# Altium PCB PCB_Board ESP32S 3-XYZ_2021-06-26.pcbdoc
Units mil, origin at the board's own origin, x right, y up, seen from the top; angles counter-clockwise.
Board outline 11580 x 6820 mil, 2 copper layers (Top Layer, Bottom Layer); 73 components, 87 nets, 284 pads, 17 vias.
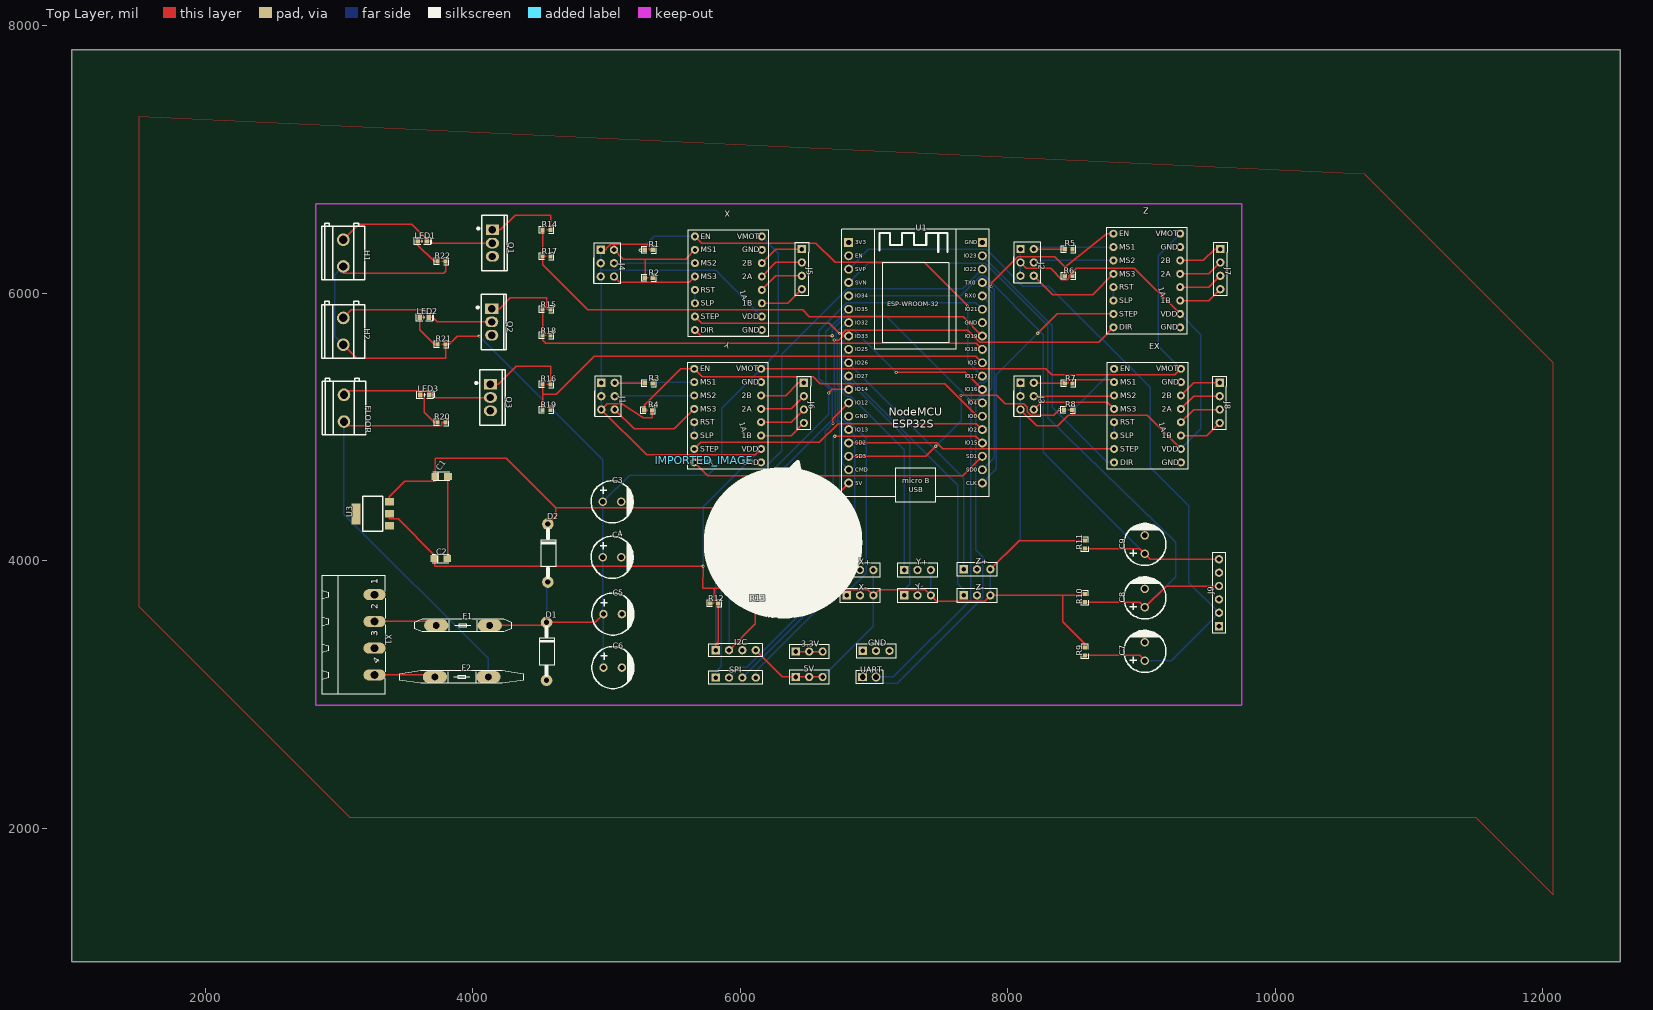
[diagram p0: Top Layer view]
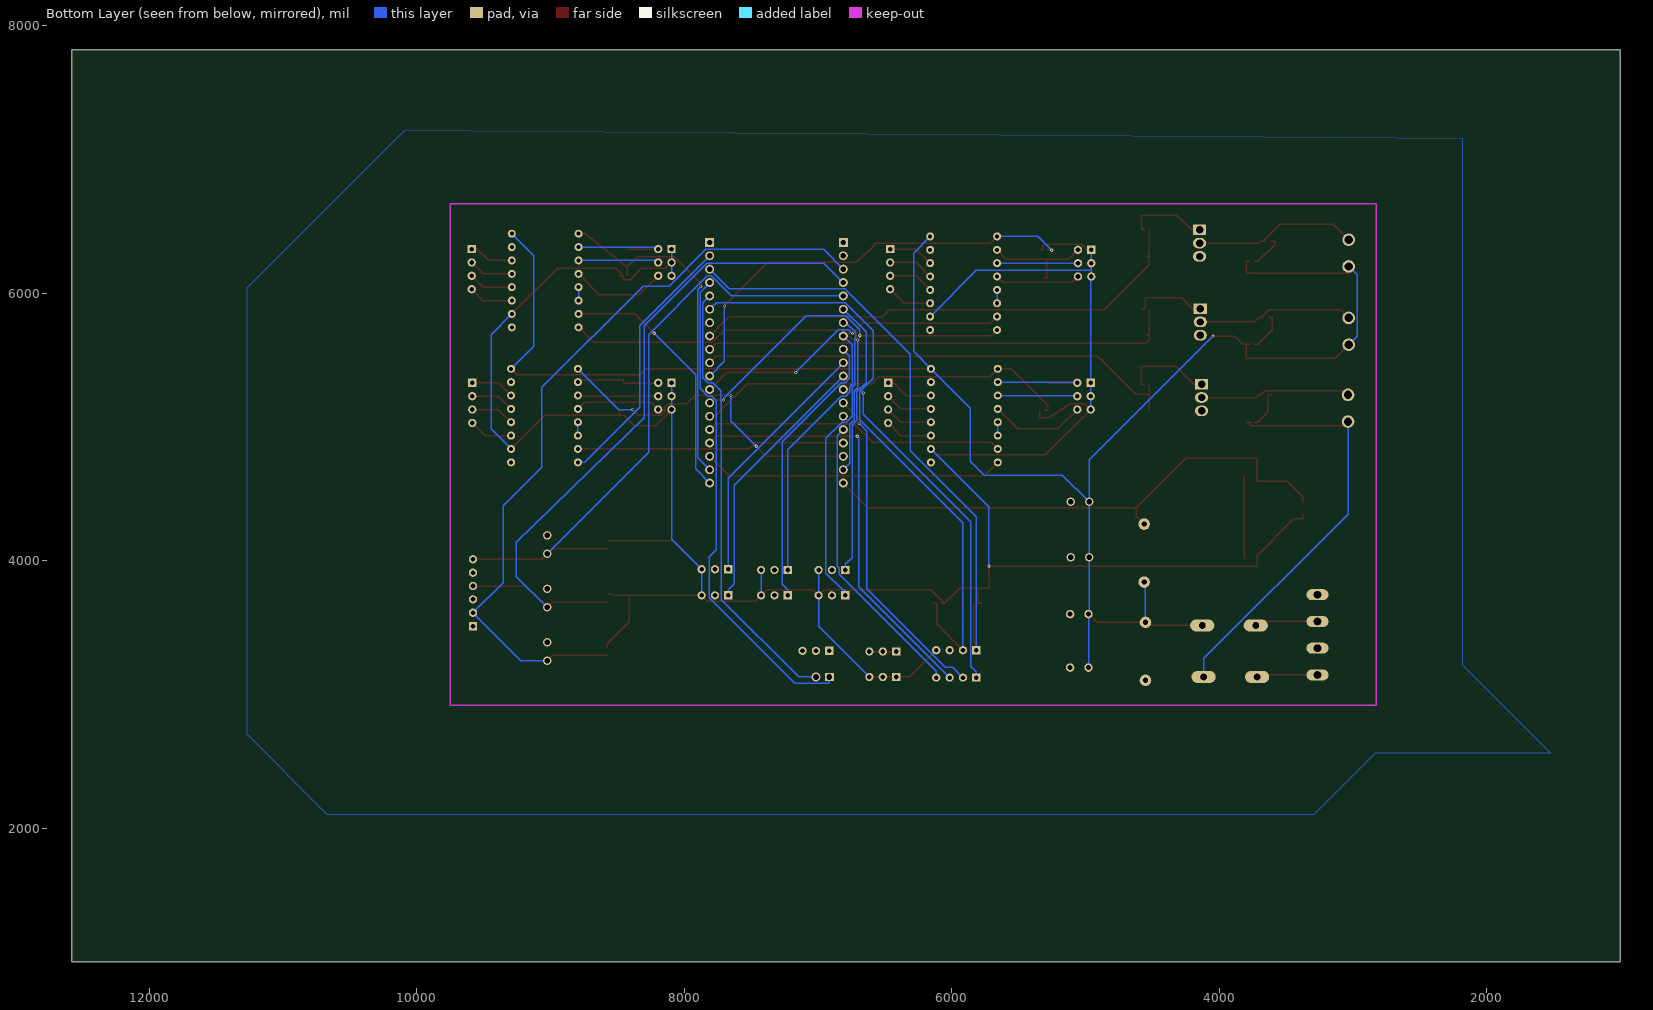
[diagram p1: Bottom Layer view, seen from below]

## Layer stack, top to bottom
Top Layer: signal copper (thickness not stored)
Dielectric: dielectric 12.6, FR-4, Dk 4.8
Bottom Layer: signal copper (thickness not stored)

## Board outline
12580,1000 1000,1000 1000,7820 12580,7820

## Components (designator, comment, footprint, x,y, rotation, side; value= is the part's Value field where it differs from the comment)
3.3V "HDR-M-2.54_1x3" HDR-M-2.54_1X3 6515,3320 r0 top
5V "HDR-M-2.54_1x3" HDR-M-2.54_1X3 6515,3130 r0 top
C1 "100u/16V" CASE-A_3216 3765,4630 r0 top
C2 "22u/16V" CASE-A_3216 3760,4015 r0 top
C3 "100u" CAP-D8.0×F3.5 5040,4440 r0 top
C4 "100u" CAP-D8.0×F3.5 5040,4025 r0 top
C5 "100u" CAP-D8.0×F3.5 5045,3600 r0 top
C6 "100u" CAP-D8.0×F3.5 5045,3200 r0 top
C7 "10u" CAP-D8.0×F3.5 9025,3320 r90 top
C8 "10u" CAP-D8.0×F3.5 9025,3720 r90 top
C9 "10u" CAP-D8.0×F3.5 9025,4120 r90 top
D1 "1N4004" "DIODE LEAD SP 11MM" 4550,3105 r0 top
D2 "1N4004" "DIODE LEAD SP 11MM" 4560,3840 r0 top
EX "A4988" "A4988 STEPPER MOTOR DRIVER CARRIER" 9045,5085 r0 top
F1 "MFR500" MFR500 3925,3515 r0 top
F2 "MFR1100" MFR1100 3915,3130 r0 top
FLOOR "CONN-TH_2P-P5.08" CONN-TH_2P-P5.08 3035,5140 r270 top
GND "HDR-M-2.54_1x3" HDR-M-2.54_1X3 7015,3325 r0 top
H1 "CONN-TH_2P-P5.08" CONN-TH_2P-P5.08 3030,6300 r270 top
H2 "CONN-TH_2P-P5.08" CONN-TH_2P-P5.08 3030,5715 r270 top
I2C "HDR-M-2.54_1x4" HDR-M-2.54_1X4 5965,3330 r0 top
IMPORTED_IMAGE "IMPORTED_IMAGE" IMPORTED_IMAGE 5728.75,4750.41 r0 top
J1 "HDR-M-2.54_2x3" HDR-M-2.54_2X3 4960,5330 r270 top
J2 "HDR-M-2.54_2x3" HDR-M-2.54_2X3 8095,6330 r270 top
J3 "HDR-M-2.54_2x3" HDR-M-2.54_2X3 8095,5330 r270 top
J4 "HDR-M-2.54_2x3" HDR-M-2.54_2X3 4955,6325 r270 top
J5 "HDR-M-2.54_1x4" HDR-M-2.54_1X4 6460,6180 r270 top
J6 "HDR-M-2.54_1x4" HDR-M-2.54_1X4 6475,5180 r270 top
J7 "HDR-M-2.54_1x4" HDR-M-2.54_1X4 9590,6180 r270 top
J8 "HDR-M-2.54_1x4" HDR-M-2.54_1X4 9585,5180 r270 top
J9 "HDR-M-2.54_1x6" HDR-M-2.54_1X6 9580,3760 r90 top
LED1 "LED-0603_R" LED0603_RED 3620,6390 r0 top
LED2 "LED-0603_R" LED0603_RED 3635,5820 r0 top
LED3 "LED-0603_R" LED0603_RED 3640,5240 r0 top
Q1 "STP55NF06L" TO-220-3_L10.0-W4.5-P2.54-L 4145,6375 r270 top
Q2 "STP55NF06L" TO-220-3_L10.0-W4.5-P2.54-L 4140,5785 r270 top
Q3 "STP55NF06L" TO-220-3_L10.0-W4.5-P2.54-L 4130,5220 r270 top
R1 "10k" R0603 5315,6325 r0 top
R2 "100k" R0603 5315,6115 r0 top
R3 "100k" R0603 5315,5325 r0 top
R4 "10k" R0603 5310,5125 r0 top
R5 "100k" R0603 8455,6330 r0 top
R6 "10k" R0603 8455,6130 r0 top
R7 "100k" R0603 8455,5325 r0 top
R8 "10k" R0603 8450,5130 r0 top
R9 "4.7K" R0603 8575,3320 r90 top
R10 "4.7K" R0603 8575,3720 r90 top
R11 "4.7K" R0603 8575,4120 r90 top
R12 "4.7k" R0603 5805,3680 r0 top
R13 "4.7k" R0603 6110,3680 r0 top
R14 "10 Oh" R0603 4550,6475 r0 top
R15 "10 Oh" R0603 4550,5880 r0 top
R16 "10 Oh" R0603 4550,5320 r0 top
R17 "100k" R0603 4550,6275 r0 top
R18 "100k" R0603 4550,5685 r0 top
R19 "100k" R0603 4550,5130 r0 top
R20 "1.8K" R0603 3765,5035 r0 top
R21 "1.8K" R0603 3765,5620 r0 top
R22 "1.8K" R0603 3765,6240 r0 top
SPI "HDR-M-2.54_1x4" HDR-M-2.54_1X4 5965,3125 r0 top
U1 "NODEMCU_ESP32-DEVKITC" NODEMCU-ESP32S 6710,6580 r0 top
U3 "AMS1117" AMS1117 3085,4220 r90 top
UART "HDR-M-2.54_1x2" HDR-M-2.54_1X2 6965,3130 r0 top
X "A4988" "A4988 STEPPER MOTOR DRIVER CARRIER" 5910,6075 r0 top
X1 "CON-PHOENIX-508_MSTBA4" MSTBA4 3100,3460 r270 top
X+ "HDR-M-2.54_1x3" HDR-M-2.54_1X3 6895,3930 r0 top
X- "HDR-M-2.54_1x3" HDR-M-2.54_1X3 6895,3740 r0 top
Y "A4988" "A4988 STEPPER MOTOR DRIVER CARRIER" 5905,5085 r0 top
Y+ "HDR-M-2.54_1x3" HDR-M-2.54_1X3 7325,3930 r0 top
Y- "HDR-M-2.54_1x3" HDR-M-2.54_1X3 7325,3740 r0 top
Z "A4988" "A4988 STEPPER MOTOR DRIVER CARRIER" 9040,6095 r0 top
Z+ "HDR-M-2.54_1x3" HDR-M-2.54_1X3 7770,3935 r0 top
Z- "HDR-M-2.54_1x3" HDR-M-2.54_1X3 7770,3740 r0 top

## Footprints (in the part's own frame and the unit in brackets; to place one, negate y for a bottom-side part, rotate by r counter-clockwise, add the part's x,y. Pads: shape width x height; smd on the part's side, far side on the other; paste and mask are expansions set on the pad)
"A4988 STEPPER MOTOR DRIVER CARRIER" [mil]
  round 60 hole 30: 1(-250,350) 2(-250,250) 3(-250,150) 4(-250,50) 5(-250,-50) 6(-250,-150) 7(-250,-250) 8(-250,-350) 9(250,-350) 10(250,-250) 11(250,-150) 12(250,-50) 13(250,50) 14(250,150) 15(250,250) 16(250,350)
  silkscreen extent -300,-400 300,400
AMS1117 [mil]
  rect 55.12x66.93 smd: 1(40,-290) 2(130,-290) 3(220,-290)
  rect 157.48x66.93 smd: 4(130,-40)
  silkscreen extent 0,-240 260,-90
CAP-D8.0×F3.5 [mm]
  round 1.6 hole 1: 1(-1.75,0) 2(1.75,0)
  silkscreen extent -3.96,-4 4.04,4
CASE-A_3216 [mil]
  rect 59.05x53.5 smd: 1(-47.24,0) 2(47.25,0)
  silkscreen extent -65,-30 61,33
CONN-TH_2P-P5.08 [mm]
  round 2.4 hole 1.6: 1(-2.54,0) 2(2.54,0)
  silkscreen extent -5.72,-4.1 5.08,4.1
"DIODE LEAD SP 11MM" [mm]
  round 2.2 hole 1: A(0,-0.011) C(0,10.999)
  silkscreen extent -1.27,1 1.47,10
HDR-M-2.54_1X2 [mm]
  rect 1.7x1.575 hole 1.1: 1(-1.27,0)
  round 1.7 hole 1.1: 2(1.27,0)
  silkscreen extent -2.54,-1.27 2.54,1.27
HDR-M-2.54_1X3 [mil]
  rect 62x62 hole 35: 1(-100,0)
  round 62 hole 35: 2(0,0) 3(100,0)
  silkscreen extent -150,-50 150,50
HDR-M-2.54_1X4 [mil]
  rect 62x62 hole 35: 1(-150,0)
  round 62 hole 35: 2(-50,0) 3(50,0) 4(150,0)
  silkscreen extent -200,-50 200,50
HDR-M-2.54_1X6 [mil]
  rect 62x62 hole 35: 1(-250,0)
  round 62 hole 35: 2(-150,0) 3(-50,0) 4(50,0) 5(150,0) 6(250,0)
  silkscreen extent -300,-50 300,50
HDR-M-2.54_2X3 [mil]
  rect 62x62 hole 35: 1(0,0)
  round 62 hole 35: 2(0,100) 3(100,0) 4(100,100) 5(200,0) 6(200,100)
  silkscreen extent -50,-50 250,150
IMPORTED_IMAGE [mil]
  silkscreen extent 0,-1181 1181,0
LED0603_RED [mm]
  rect 0.9x1 smd: 1(-0.85,0) 2(0.85,0)
  silkscreen extent -1.54,-0.73 1.75,0.73
MFR500 [mil]
  oval 181.1x90.55 hole 47.24 slot 47.44 at 0 deg: 1(-200,0) 2(200,0)
  silkscreen extent -365,-45 365,45
MFR1100 [mil]
  oval 181.1x90.55 hole 47.24 slot 47.44 at 0 deg: 1(-200,0) 2(200,0)
  silkscreen extent -465,-45 465,45
MSTBA4 [mil]
  oval 82.5x165 hole 55 slot 55.2 at 90 deg: 1(-285.04,163.78) 2(-85.04,163.78) 3(114.96,163.78) 4(314.96,163.78)
  silkscreen extent -425,-231 455,244
NODEMCU-ESP32S [mm]
  rect 1.7x1.7 hole 1: 1(2.54,-5.08) 38(27.94,-5.08)
  round 1.7 hole 1: 2(2.54,-7.62) 3(2.54,-10.16) 4(2.54,-12.7) 5(2.54,-15.24) 6(2.54,-17.78) 7(2.54,-20.32) 8(2.54,-22.86) 9(2.54,-25.4) 10(2.54,-27.94) 11(2.54,-30.48) 12(2.54,-33.02) 13(2.54,-35.56) 14(2.54,-38.1) 15(2.54,-40.64) 16(2.54,-43.18) 17(2.54,-45.72) 18(2.54,-48.26) 19(2.54,-50.8) 20(27.94,-50.8) 21(27.94,-48.26) 22(27.94,-45.72) 23(27.94,-43.18) 24(27.94,-40.64) 25(27.94,-38.1) 26(27.94,-35.56) 27(27.94,-33.02) 28(27.94,-30.48) 29(27.94,-27.94) 30(27.94,-25.4) 31(27.94,-22.86) 32(27.94,-20.32) 33(27.94,-17.78) 34(27.94,-15.24) 35(27.94,-12.7) 36(27.94,-10.16) 37(27.94,-7.62)
  silkscreen extent 1.27,-54.32 29.21,-2.54
R0603 [mil]
  rect 31.75x34.02 smd: 1(-29.65,0) 2(29.65,0)
  silkscreen extent -55,-26 55,26
TO-220-3_L10.0-W4.5-P2.54-L [mm]
  rect 2x2.5 hole 1.4: 1(-2.54,0)
  oval 2x2.5 hole 1.4: 2(0,0) 3(2.54,0)
  silkscreen extent -5.3,-2.86 5.3,2.8

## Via types
v1: diameter 24.02, hole 12.01, Top Layer to Bottom Layer, 17 vias

## Nets (pads, with @x,y where several pads share a name; then routed paths per layer and width w, separated by ;. In a path a pad name is that pad's centre, name@x,y a point inside that pad or via, vN(x,y) a via of type N, cw(c..) or ccw(c..) an arc to the next point about the centre after c; other vN are vias at no path point)
3.3V: 3.3V.1 3.3V.2 3.3V.3 | length 200
  Top Layer w10: 3.3V.1 3.3V.2 3.3V.3
3V3: U1.1
5V: 5V.1 5V.2 5V.3 C2.1 EX.10 I2C.4 J1.1 J1.3 J1.5 J2.1 J2.3 J2.5 J3.1 J3.3 J3.5 J4.1 J4.3 J4.5 R1.2 R4.2 R6.2 R8.2 R9.2 R10.2 R11.2 R12.1 R13.1 U3.2 X+.3 X-.3 X.10 Y+.3 Y-.3 Y.10 Z+.3 Z-.3 Z.10 | length 20894.1
  Top Layer w10: U3.2 3375,4311.37 3439.21,4311.37 3717.76,4032.82 3712.76,4027.82 C2.1 ; C2.1@3717.76,4013.91 3716.67,4015 C2.1 ; J4.1 4997.07,6325 4997.07,6335.53 5028.61,6367.07 5302.59,6367.07 5317.71,6351.95 5317.71,6325 R1.2 ; R4.2 5339.7,5069.7 5275,5070 5111.3,5173.7 5003.8,5173.7 J1.5 5298.75,4791.25 6111.25,4791.25 Y.10 ; R12.1 5802.29,3680 5802.29,3706.95 5803.4,3795 ; 5805,3795 5803.4,3795 ; 5807,3795 5720,3795 v1(5721.12,3957.18) 3717.76,3957.18 3712.76,3962.18 C2.1 ; R13.1 6053.4,3680 ; I2C.4 6315,3130 5V.1 5V.2 5V.3 ; Z+.3 8084.66,4149.66 R11.2 ; J3.5 8215,5010 8375.6,5010 8452.7,5087.1 9042.9,5087.1 EX.10 ; J2.3 8139.29,6185.71 8321.1,6185.71 8404.89,6101.92 8445.8,6101.92 8457.71,6113.83 8457.71,6130 ; 8452.71,5130 R8.2 ; R6.2 8457.71,6130 ; 8485,5088.55 R8.2@8485,5131.45 ; 8537.3,3740 8410,3740 8410,3541.6 8575,3376.6 R9.2 ; R10.2 8546.92,3749.66 8537.26,3740 Z-.3 7827.92,3697.92 7467.08,3697.92 Y-.3 7382.92,3782.08 7037.08,3782.08 X-.3 6952.92,3782.08 6155.48,3782.08 6053.4,3680 ; Z.10 8946.55,6188.45 8511.97,6188.45 8473.8,6150.28 8473.8,6146.93 8457.71,6130.84 8457.71,6130 ; 5803.4,3795 5938.4,3795 6053.4,3680
  Bottom Layer w10: J4.1 J4.3 4955,6170.4 ; J1.5 J1.3 J1.1 4960,6120 J4.5 4955,6170.4 ; v1(5721.12,3957.18) 5721.12,4401.12 Y.10 ; X.10 5814.6,6170.4 4955,6170.4 ; 5V.3 6995,3510 X-.3 X+.3 ; Y-.3 Y+.3 ; Z-.3 Z+.3 8095,4160 J3.5 J3.3 J3.1 ; J2.5 J2.3 J2.1 ; Z.10 9445,5690 9445,4985 EX.10
12V: C3.1 C4.1 C5.1 C6.1 D1.C D2.A EX.16 F1.2 H1.2 H2.2 R21.2 R22.2 X.16 Y.16 Z.16 | length 14079.8
  Top Layer w10: H2.2 3130,5515 3794.7,5515 R21.2 ; H1.2 3030,6150 3780,6150 3794.7,6164.7 R22.2 ; 3767.71,5620 3781.19,5620 R21.2 3821.6,5620 3880.84,5679.24 v1(4045.45,5679.24) ; 3767.71,6240 R22.2 ; F1.2 4526.95,3515 D1.C 4914.13,3538.03 C5.1 ; Y.16 8283.7,5435 8329.65,5389.05 9249.05,5389.05 EX.16
  Bottom Layer w10: H2.2 2967.49,5677.51 2967.49,6137.49 H1.2 ; v1(4045.45,5679.24) 4971.1,4753.59 C3.1 ; D1.C 4549.98,3829.57 D2.A ; C6.1 C5.1 4971.1,3605 C4.1 C3.1 ; X.16 6285,6300 6285,5565 Y.16 5860,5140 5860,4745 5755,4640 5171.1,4640 C3.1 ; Z.16 9125,6280 9125,5605 EX.16
12V2: F2.2 FLOOR.2 R20.2 | length 3158.1
  Top Layer w10: FLOOR.2 3068.09,5006.91 3766.57,5006.91 3767.71,5008.05 3767.71,5035 R20.2
  Bottom Layer w10: FLOOR.2 3035,4348.65 4115,3268.65 F2.2
C2_2: C1.2 C2.2 | length 617.1
  Top Layer w10: C2.2 3807.24,4027.82 3812.24,4032.82 C1.2
CLK: SPI.1 U1.12 | length 2638.9
  Top Layer w10: v1(6661.6,5254.08) 6687.52,5280 U1.12
  Bottom Layer w10: SPI.1 5815,3167.07 ; 5815,3167.1 5857.1,3209.1 5857.1,4292.1 6661.6,5096.6 v1(6661.6,5254.08)
DIR_EX: EX.8 U1.37 | length 1983.3
  Bottom Layer w10: U1.37 8332.42,5757.58 8332.42,5145.78 8743.2,4735 EX.8
DIR_X: U1.26 X.8 | length 2531.1
  Top Layer w10: X.8 5702.89,5682.11 v1(6687.13,5682.11) ; v1(7705.18,5201.51) 7788.49,5201.51 U1.26
  Bottom Layer w10: v1(6687.13,5682.11) 6687.13,5726.5 6790.63,5830 7088.42,5830 7705.18,5213.24 v1(7705.18,5201.51)
DIR_Y: U1.22 Y.8 | length 2257
  Top Layer w10: Y.8 5755.63,4634.37 7664.37,4634.37 U1.22
DIR_Z: U1.18 Z.8 | length 3229.2
  Top Layer w10: v1(6702.7,5649.9) 6737.62,5649.9 6764.95,5677.23 6764.95,5701.11 6788.43,5724.59 7702.43,5724.59 7791.92,5635.1 8680.1,5635.1 Z.8
  Bottom Layer w10: v1(6702.7,5649.9) 6702.7,5291.7 6726.5,5268 6726.5,5055.4 6761,5020.8 6761,4729 U1.18
EN_EX: EX.1 R8.1 U1.17 | length 2544.1
  Top Layer w10: U1.17 7385.71,4780 v1(7461.58,4855.87) ; v1(7650.3,5235.46) 7916.04,5235.46 7979.42,5172.08 8118.92,5172.08 8145,5146 8145,5113.47 8171.36,5087.11 8343.42,5087.11 v1(8386.31,5130) 8393.4,5130 R8.1
  Bottom Layer w10: v1(7461.58,4855.87) 7650.3,5044.59 v1(7650.3,5235.46) ; v1(8386.31,5130) 8490,5130 EX.1
EN_X: R1.1 U1.28 X.1 | length 3314.4
  Top Layer w10: v1(5250.47,6321.09) 5254.49,6321.09 5258.4,6325 R1.1 ; X.1 5710,6375 6565,6375 6710,6230 7374.01,6230 v1(7699.54,5904.47)
  Bottom Layer w10: v1(5250.47,6321.09) 5354.38,6425 X.1 ; v1(7699.54,5904.47) 7699.54,5490.46 U1.28
EN_Y: R4.1 U1.25 Y.1 | length 2852.8
  Top Layer w10: R4.1 5280.3,5160.3 5555,5435 Y.1 5713.92,5376.08 6544.69,5376.08 6596.23,5324.54 7528.59,5324.54 7773.13,5080 U1.25 ; R4.1 5307.29,5125
EN_Z: R6.1 U1.21 Z.1 | length 2624.5
  Top Layer w10: v1(7875.1,6049.92) 7875.1,6075 8073.4,6273.3 8351.7,6273.3 8425.3,6199.7 R6.1 ; 8425.3,6196 8740.34,6445 Z.1
  Bottom Layer w10: U1.21 7897.81,4767.81 7897.81,6027.21 v1(7875.1,6049.92)
EX_2: EX.2 J3.2 R7.1 | length 637
  Top Layer w10: J3.2 8200,5325 R7.1 8452.29,5325 8452.29,5351.95 8453.43,5353.09 8776.91,5353.09 EX.2
EX_3: EX.3 J3.4 | length 602.1
  Top Layer w10: J3.4 8790,5230 EX.3
EX_4: EX.4 J3.6 | length 643.5
  Top Layer w10: J3.6 8250,5185 8745,5185 EX.4
EX_5: EX.5 EX.6 | length 100
  Bottom Layer w10: EX.6 EX.5
EX_11: EX.11 J8.4 | length 329.4
  Top Layer w10: EX.11 9490,4935 J8.4
EX_12: EX.12 J8.3 | length 329.4
  Top Layer w10: EX.12 9390,5130 J8.3
EX_13: EX.13 J8.2 | length 329.4
  Top Layer w10: EX.13 9390,5230 J8.2
EX_14: EX.14 J8.1 | length 329.4
  Top Layer w10: EX.14 9390,5330 J8.1
FLOOR: R16.1 R19.1 U1.29 | length 3664.1
  Top Layer w10: 4520.3,5291.9 4520.3,5245 4622,5245 4905.5,5528.5 7761.5,5528.5 U1.29 ; R19.1 4520.34,5291.91 R16.1
GND: C3.2 C4.2 C5.2 C6.2 C7.2 C8.2 C9.2 D1.A EX.9 EX.15 GND.1 GND.2 GND.3 I2C.3 J9.1 J9.3 J9.5 Q1.3 Q2.3 Q3.3 R2.2 R3.2 R5.2 R7.2 R17.2 R18.2 R19.2 U1.14 U1.32 U1.38 U3.1 X1.1 X1.3 X+.2 X-.2 X.9 X.15 Y+.2 Y-.2 Y.9 Y.15 Z+.2 Z-.2 Z.9 Z.15
H1: R14.1 R17.1 U1.31 | length 3804
  Top Layer w10: R17.1 4520.3,6214.7 4860,5875 6465.5,5875 6516,5824.5 7665.5,5824.5 U1.31 ; R17.1 R17.1@4533.82,6275 ; R14.1 4520.34,6288.48 R17.1@4533.82,6275 ; 4547.29,6275 R17.1@4533.82,6275
H2: R15.1 R18.1 U1.30 | length 3581.4
  Top Layer w10: R18.1 4520.3,5649.7 4545.3,5624.7 7765.3,5624.7 U1.30 ; R18.1 R18.1@4533.82,5685 ; R15.1 4520.34,5698.48 R18.1@4533.82,5685 ; 4547.29,5685 R18.1@4533.82,5685
LED1_1: LED1.1 R22.1 | length 258.7
  Top Layer w10: LED1.1 3581.7,6383.4 3584.8,6363.6 3708.4,6240 R22.1 ; LED1.1 3615.31,6390
LED2_1: LED2.1 R21.1 | length 330.9
  Top Layer w10: LED2.1 3630.31,5820 3600,5820 3600,5728.4 3708.4,5620 R21.1
LED3_1: LED3.1 R20.1 | length 291
  Top Layer w10: LED3.1 3635.31,5240 3635.31,5108.09 3708.4,5035 R20.1
MISO: SPI.2 U1.13 | length 2459.2
  Top Layer w10: v1(6692.7,5026.45) 6692.7,5062.7 U1.13
  Bottom Layer w10: SPI.2 5990.7,3200.7 6047.9,3200.7 6635,3787.8 6635,4968.7 v1(6692.7,5026.45)
MOSI: SPI.4 U1.15 | length 2179.9
  Bottom Layer w10: SPI.4 6115,3172 6839.3,3896.3 6839.3,3942.34 6854.7,3957.74 6854.7,4935.3 U1.15
Q1_2: H1.1 LED1.2 Q1.2 | length 1235.1
  Top Layer w10: H1.1 3145,6515 3542.9,6515 LED1.2@3667.9,6390 ; LED1.2 3667.85,6390 3682.24,6390 3697.24,6375 Q1.2
Q2_2: H2.1 LED2.2 Q2.2 | length 1186.6
  Top Layer w10: H2.1 3090,5875 3627.9,5875 LED2.2@3682.9,5820 ; LED2.2 3682.85,5820 3697.24,5820 3732.24,5785 Q2.2
Q3_2: FLOOR.1 LED3.2 Q3.2 | length 1143.2
  Top Layer w10: FLOOR.1 3065.77,5270.77 3657.08,5270.77 LED3.2@3687.85,5240 ; LED3.2 LED3.2@3687.85,5240 ; Q3.2 3722.24,5220 3702.24,5240 LED3.2@3687.85,5240
R14_2: Q1.1 R14.2 | length 617.5
  Top Layer w10: Q1.1 4205.27,6475 ; 4205.3,6475 4315.3,6585 4580,6585 R14.2 4552.71,6475
R15_2: Q2.1 R15.2 | length 557.8
  Top Layer w10: Q2.1 4200.27,5885 ; 4200.3,5885 4280.3,5965 4552.7,5965 4552.7,5880 R15.2
R16_2: Q3.1 R16.2 | length 668.2
  Top Layer w10: Q3.1 4190.27,5320 ; 4190.3,5320 4325.3,5455 4580,5455 4580,5320 R16.2 4552.71,5320
RX: U1.34 UART.2 | length 3319.9
  Bottom Layer w10: UART.2 7145.17,3130 7722.89,3707.72 7722.89,5186.57 7728.26,5191.94 7728.26,5269.96 7788.3,5330 7823.96,5330 7862.46,5368.5 7862.46,5927.54 U1.34
S$71: 
S$560: 
S$562: 
S$564: 
SCL: I2C.1 R12.2 U1.36 | length 4540.3
  Top Layer w10: I2C.1 5815,3372.07 5834.66,3391.73 R12.2
  Bottom Layer w10: I2C.1 5815,4328 6310,4823 6310,5543.4 6798.5,6031.9 7661.9,6031.9 U1.36
SDA: I2C.2 R13.2 U1.33 | length 4540.8
  Top Layer w10: I2C.2 6112.71,3527.71 6112.71,3680 R13.2
  Bottom Layer w10: I2C.2 5915,4281.4 6686.4,5052.8 6686.4,5262.5 6585,5363.9 6585,5718.3 6795.2,5928.5 7761.5,5928.5 U1.33
SS: SPI.3 U1.23 | length 3222.4
  Top Layer w10: v1(6705.72,4929.99) 7760.01,4929.99 U1.23
  Bottom Layer w10: SPI.3 6695,3805 6695,4930 v1(6705.72,4929.99)
STEP_EX: EX.7 U1.16 | length 2003.6
  Top Layer w10: U1.16 7470.1,4880 7515.1,4835 EX.7
STEP_X: U1.27 X.7 | length 2398.1
  Top Layer w10: X.7 5710,5775 6665.04,5775 v1(6741.87,5698.17) ; v1(7165.31,5407.31) 7682.69,5407.31 U1.27
  Bottom Layer w10: v1(6741.87,5698.17) 6768.89,5725.19 6847.43,5725.19 v1(7165.31,5407.31)
STEP_Y: U1.24 Y.7 | length 2252.1
  Top Layer w10: Y.7 5705,4885 6591.15,4885 6730.89,5024.74 7765.26,5024.74 U1.24
STEP_Z: U1.20 Z.7 | length 1917.2
  Top Layer w10: v1(8224.56,5700.01) 8369.55,5845 Z.7
  Bottom Layer w10: U1.20 7915.64,4685.64 7915.64,5391.09 v1(8224.56,5700.01)
T1: C7.1 J9.2 R9.1 U1.3 | length 5811.9
  Top Layer w10: R9.1 8985.76,3290.34 C7.1
  Bottom Layer w10: U1.3 6957.4,6327.4 7837.6,6327.4 8111.3,6053.7 8306.3,6053.7 9065,5295 9065,4699.9 9355,4409.9 9355,3835 J9.2 9221.1,3251.1 C7.1
T2: C8.1 J9.4 R10.1 U1.4 | length 5434.2
  Top Layer w10: R10.1 8985.76,3690.34 C8.1 9183.9,3810 J9.4
  Bottom Layer w10: U1.4 6954.6,6224.6 7832.9,6224.6 8300,5757.5 8300,5070 9255,4137 9255,3881.1 C8.1
T3: C9.1 J9.6 R11.1 U1.5 | length 4692.3
  Top Layer w10: R11.1 8985.76,4090.34 C9.1 9066.1,4010 J9.6
  Bottom Layer w10: U1.5 7647.02,5980 7796.26,6129.24 7828.43,6129.24 8266.74,5690.93 8266.74,4809.36 C9.1
TX: U1.35 UART.1 | length 3683.8
  Bottom Layer w10: UART.1 6915,3087.93 6919.68,3083.25 7174.84,3083.25 7812.99,3721.4 7812.99,4028.54 7760.46,4081.07 7760.46,5195.76 7794.7,5230 7823.96,5230 7881.71,5287.75 7881.71,6008.29 U1.35
VCC: C1.1 D2.C U1.19 U3.3 | length 4069.2
  Top Layer w10: U3.3 3375,4478.67 3488.51,4592.18 3717.76,4592.18 C1.1 3717.76,4667.82 ; 3717.8,4667.8 3717.8,4765 4248.1,4765 4617.4,4395.8 ; D2.C 4617.38,4330.43 4617.38,4395.75 6625.75,4395.75 U1.19
X1_2: F1.1 X1.2 | length 473.7
  Top Layer w10: X1.2 3694.96,3545.04 F1.1
X1_4: F2.1 X1.4 | length 457.4
  Top Layer w10: X1.4 3699.96,3145.04 F2.1
X+: U1.6 X+.1 | length 2084.6
  Bottom Layer w10: X+.1 6795,3972.07 ; 6795,3972.1 6744.9,4022.2 6744.9,5014.2 6709.4,5049.7 6709.4,5262.3 6640,5331.7 6640,5710 U1.6
X-: U1.7 X-.1 | length 2269.6
  Bottom Layer w10: X-.1 6795,3782.07 6816.03,3782.07 6939.86,3905.9 6939.86,4913.89 6818.58,5035.17 6789.78,5035.17 6744.9,5080.05 6744.9,5295.05 6725.78,5314.17 6725.78,5659.47 6718.79,5666.46 6718.79,5707.73 6791.06,5780 U1.7
X_2: J4.2 R2.1 X.2 | length 832.2
  Top Layer w10: J4.2 5125,6255 5312.3,6255 ; R2.1 5312.29,6115 ; R2.1@5289.99,6110 5290,6250 ; 5310,6255 5312.3,6255 ; X.2 5590,6255 5312.3,6255
X_3: J4.4 X.3 | length 605
  Bottom Layer w10: J4.4 X.3
X_4: J4.6 X.4 | length 640.9
  Top Layer w10: J4.6 5098.3,6081.7 5616.7,6081.7 X.4
X_5: X.5 X.6 | length 100
  Bottom Layer w10: X.6 X.5
X_11: J5.4 X.11 | length 343.5
  Top Layer w10: X.11 6355,5925 J5.4
X_12: J5.3 X.12 | length 343.5
  Top Layer w10: X.12 6265,6130 J5.3
X_13: J5.2 X.13 | length 343.5
  Top Layer w10: X.13 6265,6230 J5.2
X_14: J5.1 X.14 | length 343.5
  Top Layer w10: X.14 6265,6330 J5.1
Y+: U1.8 Y+.1 | length 1994.8
  Bottom Layer w10: U1.8 6744.9,5614.9 6744.9,5317.81 6760.99,5301.72 6760.99,5262.41 6793.4,5230 6825.83,5230 7225,4830.83 Y+.1
Y-: U1.9 Y-.1 | length 2102.7
  Bottom Layer w10: U1.9 6763.87,5533.87 6763.87,5363.06 6796.93,5330 6827.15,5330 7267.07,4890.08 7267.07,3824.14 7225,3782.07 Y-.1
Y_2: J1.2 R3.1 Y.2 | length 824.5
  Top Layer w10: J1.2 5065,5325 R3.1
  Bottom Layer w10: J1.2 5065,5335 Y.2
Y_3: J1.4 Y.3 | length 597.1
  Bottom Layer w10: J1.4 5065,5235 Y.3
Y_4: J1.6 Y.4 | length 717.2
  Top Layer w10: J1.6 5205,4985 5505,4985 Y.4
Y_5: Y.5 Y.6 | length 100
  Bottom Layer w10: Y.6 Y.5
Y_11: J6.4 Y.11 | length 359.4
  Top Layer w10: Y.11 6380,4935 J6.4
Y_12: J6.3 Y.12 | length 359.4
  Top Layer w10: Y.12 6380,5035 J6.3
Y_13: J6.2 Y.13 | length 359.4
  Top Layer w10: Y.13 6380,5135 J6.2
Y_14: J6.1 Y.14 | length 359.4
  Top Layer w10: Y.14 6337.93,5235 6432.93,5330 J6.1
Z+: U1.10 Z+.1 | length 1901.2
  Bottom Layer w10: U1.10 6810,5474.81 7670,4614.81 Z+.1
Z-: U1.11 Z-.1 | length 1996.2
  Bottom Layer w10: U1.11 7625,4565 7625,3827.07 7670,3782.07 Z-.1
Z_2: J2.2 R5.1 Z.2 | length 831.6
  Top Layer w10: J2.2 R5.1
  Bottom Layer w10: J2.2 8210,6345 Z.2
Z_3: J2.4 Z.3 | length 601.2
  Bottom Layer w10: J2.4 8210,6245 Z.3
Z_4: J2.6 Z.4 | length 717.2
  Top Layer w10: J2.6 8335,5990 8635,5990 Z.4
Z_5: Z.5 Z.6 | length 100
  Bottom Layer w10: Z.6 Z.5
Z_11: J7.4 Z.11 | length 335.2
  Top Layer w10: Z.11 9505,5945 J7.4
Z_12: J7.3 Z.12 | length 335.2
  Top Layer w10: Z.12 9505,6045 J7.3
Z_13: J7.2 Z.13 | length 335.2
  Top Layer w10: Z.13 9505,6145 J7.2
Z_14: J7.1 Z.14 | length 335.2
  Top Layer w10: Z.14 9462.93,6245 9547.93,6330 J7.1
pads on no net: U1.2 U3.4

## Polygon pours and split planes (outlines as drawn)
GND on Bottom Layer (solid): 2180,7160 2180,3220 1520,2560 2830,2560 3290,2100 10670,2100 11270,2700 11270,6040 10090,7220
GND on Top Layer (solid): 1500,7320 1500,3660 3080,2080 11500,2080 12080,1500 12080,5480 10670,6890

## Text inside footprints (layer, text, board x,y; h text height)
EX: Top Overlay "MS1" at 8840,5315 h40; Top Overlay "MS2" at 8840,5215 h40; Top Overlay "MS3" at 8840,5115 h40; Top Overlay "STEP" at 8840,4815 h40; Top Overlay "DIR" at 8840,4715 h40; Top Overlay "GND" at 9150,4715 h40; Top Overlay "VDD" at 9150,4815 h40; Top Overlay "1B" at 9150,4915 h40; Top Overlay "1A" at 9130.77,5029.49 h40 r286; Top Overlay "2A" at 9150,5115 h40; Top Overlay "2B" at 9150,5215 h40; Top Overlay "GND" at 9150,5315 h40; Top Overlay "VMOT" at 9110,5415 h40; Top Overlay "EN" at 8840,5415 h40; Top Overlay "RST" at 8840,5015 h40; Top Overlay "SLP" at 8840,4915 h40; Document "A4988 Stepper Motor Driver Carrier" at 8400,5540 h50
U1: Top Overlay "SD2" at 6860,4865 h30; Top Overlay "USB" at 7260,4510.31 h39.37; Top Overlay "micro B" at 7210,4580.31 h39.37; Top Overlay "ESP-WROOM-32" at 7100,5902.28 h35.43; Top Overlay "IO13" at 6860,4965 h30; Top Overlay "GND" at 6860,5065 h30; Top Overlay "IO12" at 6860,5165 h30; Top Overlay "IO14" at 6860,5265 h30; Top Overlay "IO27" at 6860,5365 h30; Top Overlay "IO26" at 6860,5465 h30; Top Overlay "IO25" at 6860,5565 h30; Top Overlay "IO33" at 6860,5665 h30; Top Overlay "IO32" at 6860,5765 h30; Top Overlay "IO35" at 6860,5865 h30; Top Overlay "IO34" at 6860,5965 h30; Top Overlay "SVN" at 6860,6065 h30; Top Overlay "SVP" at 6860,6165 h30; Top Overlay "RX0" at 7680,5965 h30; Top Overlay "IO15" at 7680,4865 h30; Top Overlay "IO2" at 7700,4965 h30; Top Overlay "IO0" at 7700,5065 h30; Top Overlay "IO4" at 7700,5165 h30; Top Overlay "IO16" at 7680,5265 h30; Top Overlay "IO17" at 7680,5365 h30; Top Overlay "IO5" at 7700,5465 h30; Top Overlay "IO18" at 7680,5565 h30; Top Overlay "IO19" at 7680,5665 h30; Top Overlay "GND" at 7680,5765 h30; Top Overlay "IO21" at 7680,5865 h30; Top Overlay "TX0" at 7680,6065 h30; Top Overlay "IO22" at 7670,6165 h30; Top Overlay "IO23" at 7670,6265 h30; Top Overlay "EN" at 6860,6265 h30; Top Overlay "SD1" at 7690,4765 h30; Top Overlay "SD0" at 7690,4665 h30; Top Overlay "GND" at 7680,6365 h30; Top Overlay "3V3" at 6860,6365 h30; Top Overlay "SD3" at 6860,4765 h30; Top Overlay "CMD" at 6860,4665 h30; Top Overlay "NodeMCU /  ESP32S" at 7110,4995.47 h59.05; Top Overlay "CLK" at 7690,4565 h30; Top Overlay "5V" at 6860,4565 h30
X: Top Overlay "MS1" at 5705,6305 h40; Top Overlay "MS2" at 5705,6205 h40; Top Overlay "MS3" at 5705,6105 h40; Top Overlay "STEP" at 5705,5805 h40; Top Overlay "DIR" at 5705,5705 h40; Top Overlay "GND" at 6015,5705 h40; Top Overlay "VDD" at 6015,5805 h40; Top Overlay "1B" at 6015,5905 h40; Top Overlay "1A" at 5995.77,6019.49 h40 r286; Top Overlay "2A" at 6015,6105 h40; Top Overlay "2B" at 6015,6205 h40; Top Overlay "GND" at 6015,6305 h40; Top Overlay "VMOT" at 5975,6405 h40; Top Overlay "EN" at 5705,6405 h40; Top Overlay "RST" at 5705,6005 h40; Top Overlay "SLP" at 5705,5905 h40; Document "A4988 Stepper Motor Driver Carrier" at 5265,6530 h50
X1: Top Overlay "1" at 3288.78,3825.04 h50 r90; Top Overlay "2" at 3288.78,3635.04 h50 r90; Top Overlay "3" at 3288.78,3435.04 h50 r90; Top Overlay "4" at 3284.01,3220.35 h50 r54
Y: Top Overlay "MS1" at 5700,5315 h40; Top Overlay "MS2" at 5700,5215 h40; Top Overlay "MS3" at 5700,5115 h40; Top Overlay "STEP" at 5700,4815 h40; Top Overlay "DIR" at 5700,4715 h40; Top Overlay "GND" at 6010,4715 h40; Top Overlay "VDD" at 6010,4815 h40; Top Overlay "1B" at 6010,4915 h40; Top Overlay "1A" at 5990.77,5029.49 h40 r286; Top Overlay "2A" at 6010,5115 h40; Top Overlay "2B" at 6010,5215 h40; Top Overlay "GND" at 6010,5315 h40; Top Overlay "VMOT" at 5970,5415 h40; Top Overlay "EN" at 5700,5415 h40; Top Overlay "RST" at 5700,5015 h40; Top Overlay "SLP" at 5700,4915 h40; Document "A4988 Stepper Motor Driver Carrier" at 5225,5545 h50
Z: Top Overlay "MS1" at 8835,6325 h40; Top Overlay "MS2" at 8835,6225 h40; Top Overlay "MS3" at 8835,6125 h40; Top Overlay "STEP" at 8835,5825 h40; Top Overlay "DIR" at 8835,5725 h40; Top Overlay "GND" at 9145,5725 h40; Top Overlay "VDD" at 9145,5825 h40; Top Overlay "1B" at 9145,5925 h40; Top Overlay "1A" at 9125.77,6039.49 h40 r286; Top Overlay "2A" at 9145,6125 h40; Top Overlay "2B" at 9145,6225 h40; Top Overlay "GND" at 9145,6325 h40; Top Overlay "VMOT" at 9105,6425 h40; Top Overlay "EN" at 8835,6425 h40; Top Overlay "RST" at 8835,6025 h40; Top Overlay "SLP" at 8835,5925 h40; Document "A4988 Stepper Motor Driver Carrier" at 8395,6550 h50